# Altium PCB project_name.PcbDoc
Units mm, origin at the board's own origin, x right, y up, seen from the top; angles counter-clockwise.
Board outline 82.66 x 56.61 mm, 2 copper layers (Top Layer, Bottom Layer); 12 components, 74 nets, 40 pads, 0 vias.
Unrouted connection lines stored in the file: 11.
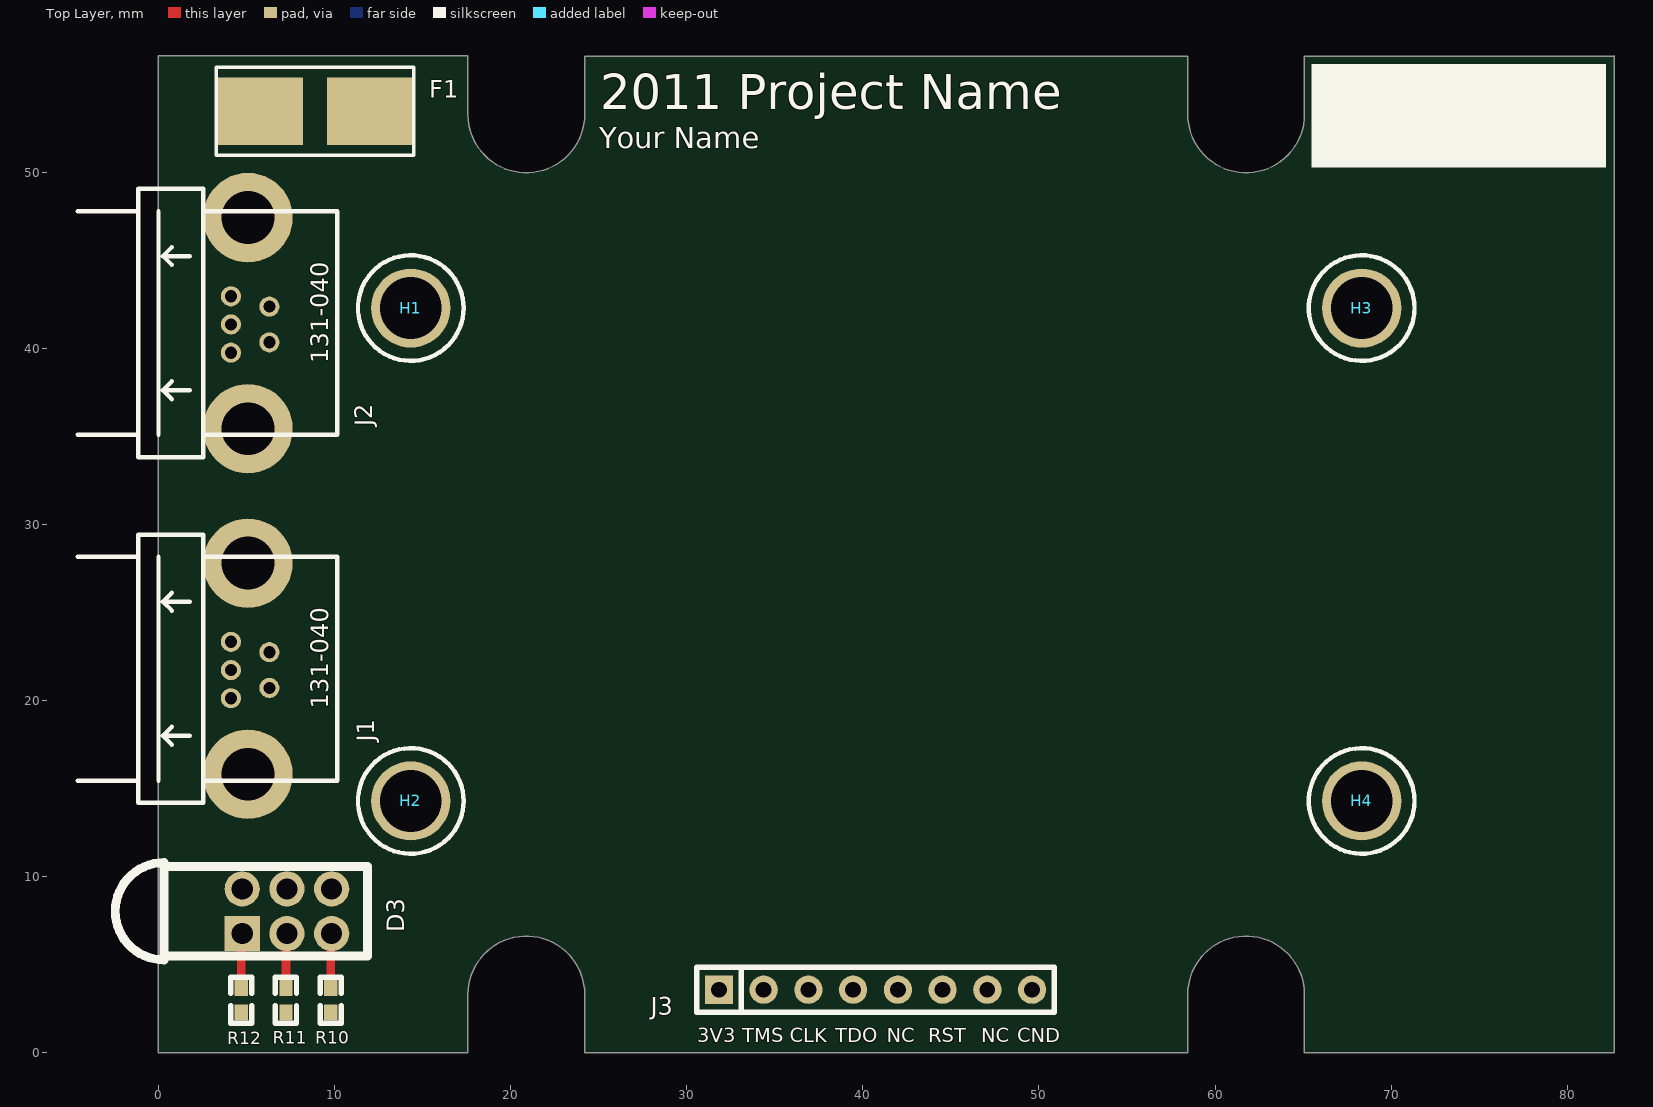
[diagram p0: Top Layer view]
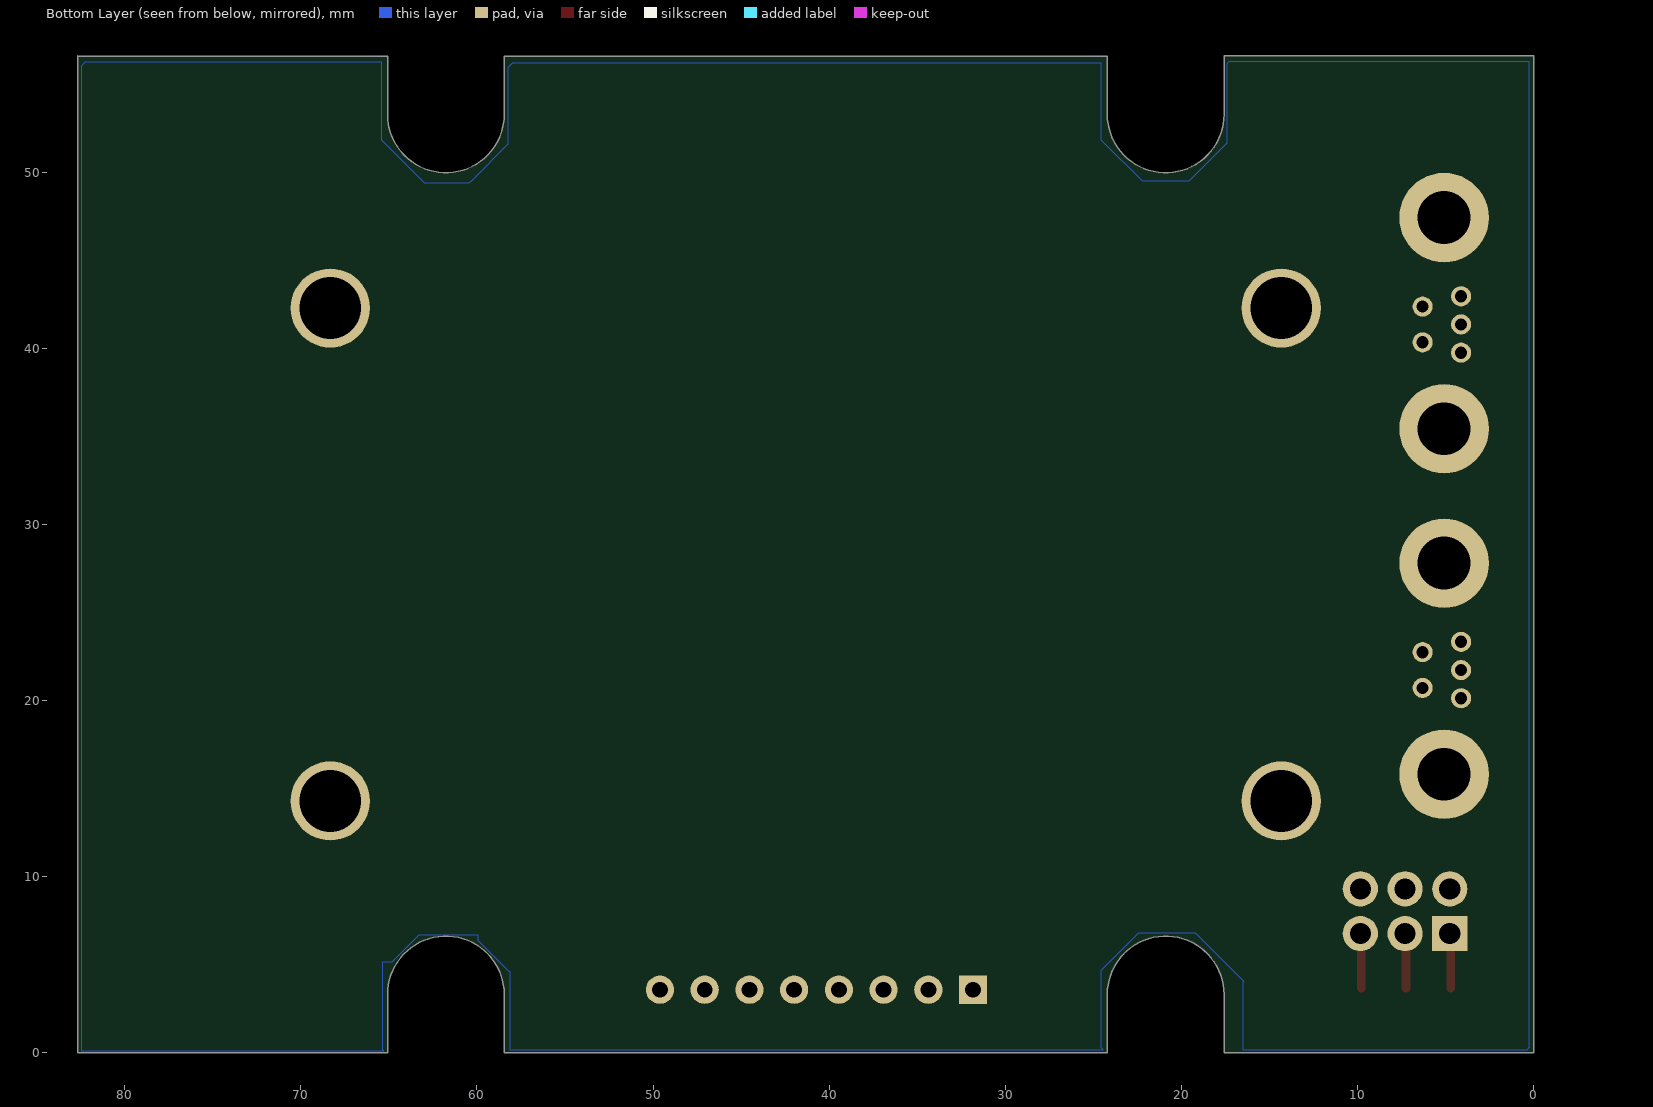
[diagram p1: Bottom Layer view, seen from below]

## Layer stack, top to bottom
Top Layer: signal copper 0.0356
Dielectric: dielectric 0.32, FR-4, Dk 4.8
Bottom Layer: signal copper 0.0356

## Board outline
17.575,0 17.575,3.31 cw(c20.89,3.31) 24.205,3.31 24.205,0 58.445,0 58.445,3.31 cw(c61.76,3.31) 65.075,3.31 65.075,0 65.08,-0.005 82.655,-0.005 82.655,56.605 82.65,56.6 65.075,56.6 65.075,53.29 cw(c61.76,53.29) 58.445,53.29 58.445,56.6 24.205,56.6 24.205,53.29 cw(c20.89,53.29) 17.575,53.29 17.575,56.605 -0.005,56.605 -0.005,-0.005 0,0

## Design rules (kind name [scope] priority, off if disabled: settings)
Clearance Clearance_1 [(HasFootprint('HMC5843 - LPCC 20 Pin') OR HasFootprint('ITG-3200 - QFN 24 Pin') OR HasFootprint('LGA - BMA180'))] p1: gap=0
Clearance [All] p2: gap=0.2
FabricationTestPointUsage TestPointUsage [All] p1: valid=0 allowmultiple=FALSE
FabricationTestpoint Testpoint [All] p1: side=3 testpointundercomponent=TRUE minsize=1.016 maxsize=2.54 preferedsize=1.524 minholesize=0 maxholesize=1.016 preferedholesize=0.813 testpointgrid=0.025 allowsidetop=TRUE allowsidebottom=TRUE usegrid=TRUE gridtolerance=0
HoleSize [All] p1 off: absolutevalues=TRUE maxlimit=5 minlimit=0.3 maxpercent=80.000 minpercent=20.000
MinimumSolderMaskSliver MinimumSolderMaskSliver_1 [(HasFootprint('ITG-3200 - QFN 24 Pin'))] p1: minsoldermaskwidth=0
MinimumSolderMaskSliver [All] p2: minsoldermaskwidth=0.254
PolygonConnect [All] p1: connectstyle=Relief reliefconductorwidth=0.254 reliefentries=4 polygonreliefangle="90 Angle"
RoutingVias [All] p1: holewidth=0.4 width=0.8 viastyle="Through Hole" minholewidth=0.4 minwidth=0.8 maxholewidth=0.4 maxwidth=0.8
SilkToSilkClearance [All] p1: silktosilkclearance=0.1
SilkscreenOverComponentPads [All] p1 off: minsilkscreentomaskgap=0.1
SolderMaskExpansion [All] p1: expansion=0.102
Width [All] p1: maxlimit=10 minlimit=0.2 preferedwidth=0.254 minimp=50.000000 maximp=50.000000 favimp=50.000000
22 further rules are at their usual default settings.

## Classes and differential pairs
component class LPC: J3
component class PWR: F1 J1 J2
component class TopLevel: D3 H1 H2 H3 H4 R10 R11 R12

## Components (designator, comment, footprint, x,y, rotation, side; value= is the part's Value field where it differs from the comment)
D3 "1882-2781" LED_TRILEVEL 4.755,6.77 r90 top
F1 "125mA/3A" LITTELFUSE-154 8.89,53.467 r0 top
H1 "HOLE" M2.5 14.326,42.291 r0 top
H2 "HOLE" M2.5 14.326,14.3 r0 top
H3 "HOLE" M2.5 68.326,42.291 r0 top
H4 "HOLE" M2.5 68.326,14.3 r0 top
J1 "CON5-S" TRIAD5F 6.3,22.75 r90 top
J2 "CON5-S" TRIAD5F 6.3,42.375 r90 top
J3 "LPC SWD Connector" IDC8 31.826,3.581 r0 top
R10 "1K" 0603 9.779,3.683 r270 top
R11 "1K" 0603 7.239,3.683 r270 top
R12 "1K" 0603 4.699,3.683 r270 top

## Footprints (in the part's own frame and the unit in brackets; to place one, negate y for a bottom-side part, rotate by r counter-clockwise, add the part's x,y. Pads: shape width x height; smd on the part's side, far side on the other; paste and mask are expansions set on the pad)
0603 [mil]
  rect 35.43x30 smd: 1(0,0) 2(55,0)
  silkscreen extent -24,-24 79,24
IDC8 [mm]
  rect 1.6x1.6 hole 0.9: 1(0,0)
  round 1.6 hole 0.9: 2(2.54,0) 3(5.08,0) 4(7.62,0) 5(10.16,0) 6(12.7,0) 7(15.24,0) 8(17.78,0)
  silkscreen extent -1.27,-1.27 19.05,1.27
LED_TRILEVEL [mm]
  rect 2x2 hole 1.2: 1(0,0)
  round 2 hole 1.2: 2(0,-2.54) 3(0,-5.08) 4(2.54,-5.08) 5(2.54,-2.54) 6(2.54,0)
  silkscreen extent -1.49,-7.11 4.03,7.21
LITTELFUSE-154 [mm]
  rect 5x3.81 smd: 1(-3.185,0) 2(3.185,0)
  silkscreen extent -5.6,-2.51 5.6,2.5
M2.5 [mm]
  round 4.5 hole 3.5: 1(0,0)
  silkscreen extent -3,-3 3,3
TRIAD5F [mil]
  round 200 hole 118.11: 0(-273,48) 0(199,48)
  round 45 hole 27.56: 1(0,0) 2(23,86) 3(-40,86) 4(-103,86) 5(-80,0)
  silkscreen extent -337,-152 263,428

## Part data
D3: library part LED-TRILEVEL, "Three level LED"
F1: library part FUSE2, "Fuse"
H1 H2 H3 H4: "Hole"
J1 J2: "Connector, 2 pin, with shield @ S"
J3: library part LPCLink_Connector
R10 R11 R12: library part RES1, "Resistor"

## Nets (pads, with @x,y where several pads share a name; then routed paths per layer and width w, separated by ;. In a path a pad name is that pad's centre, name@x,y a point inside that pad or via, vN(x,y) a via of type N, cw(c..) or ccw(c..) an arc to the next point about the centre after c; other vN are vias at no path point)
3V3: D3.4 D3.5 D3.6 J3.1
12V_MEASURE: 
/RESET: J3.6
ACC_P5: 
ACC_P7: 
ACC_P8: 
ACC_P9: 
ACCPWR: 
CAN+5V: J1.1 J2.1
CAN+12V: F1.2
CAN_H: J1.4 J2.4
CAN_L: J1.5 J2.5
CANGND: J1.3 J2.3 J3.8 R10.2
CHIPSEL: 
GYROPWR: 
I2C_SCL: 
I2C_SDA: 
MAGINT: 
MAGPWR: 
MISO1: 
MOSI1: 
NetC4_1: 
NetC7_2: 
NetC14_1: 
NetC18_1: 
NetC22_1: 
NetC23_1: 
NetC23_2: 
NetC26_2: 
NetC27_1: 
NetD2_K: 
NetD3_1: D3.1 R12.1 | length 3
  Top Layer w0.5: R12.1 D3.1@4.699,6.714
NetD3_2: D3.2 R11.1 | length 3.1
  Top Layer w0.5: R11.1 7.239,6.714 D3.2
NetD3_3: D3.3 R10.1 | length 3.1
  Top Layer w0.5: R10.1 9.779,6.714 D3.3
NetF1_1: F1.1 J1.2 J2.2
NetJ5_2: 
NetJ5_3: 
NetJ5_5: 
NetJ5_6: 
NetJ5_7: 
NetJ5_8: 
NetJ5_10: 
NetJ6_2: 
NetJ6_3: 
NetR1_1: 
NetR6_1: 
NetR7_1: 
NetR21_1: 
NetR22_1: 
NetU1_1: 
NetU1_4: 
NetU4_4: 
NetU5_12: 
NetU7_1: 
NetU7_2: 
NetU7_9: 
NetU7_10: 
NetU7_14: 
NetU7_17: 
NetU7_18: 
NetU7_21: 
NetU7_40: 
NetU7_42: 
NetU7_43: 
NetU7_45: 
NetU7_48: 
REDLED: R12.2
SCK1: 
TCLK: J3.3
TDO: J3.4
TMS: J3.2
XTALIN: 
XTALOUT: 
YELLED: R11.2
pads on no net: H1.1 H2.1 H3.1 H4.1 J1.0 J2.0 J3.5 J3.7

## Polygon pours and split planes (outlines as drawn)
CANGND on Bottom Layer "GNDPLANE" (solid, shelved, pour order 1001): 0.254,56.286 17.272,56.286 17.323,56.236 17.424,56.134 17.424,51.664 17.424,51.638 19.253,49.809 19.583,49.479 22.149,49.479 22.2,49.479 24.486,51.765 24.536,51.816 24.536,56.185 57.988,56.185 58.242,55.931 58.242,51.968 58.242,51.587 60.3,49.53 60.452,49.378 62.967,49.378 65.354,51.765 65.405,51.816 65.405,56.236 82.271,56.236 82.474,56.032 82.474,0.127 65.303,0.127 65.354,0.178 65.354,5.156 64.821,5.156 63.271,6.706 59.944,6.706 59.944,6.401 58.242,4.699 58.141,4.597 58.141,0.178 24.435,0.178 24.536,0.279 24.536,3.759 24.536,4.699 22.479,6.756 22.428,6.807 19.355,6.807 19.202,6.807 16.459,4.064 16.51,4.013 16.51,0.178 0.356,0.178 0.203,0.33 0.254,0.381 0.254,56.286
no net on Top Layer "TopShield" (solid, remove dead copper, shelved, pour order 1000): 25.552,151.562 42.723,151.562 42.774,151.511 42.774,147.98 42.774,146.964 44.806,144.932 44.831,144.907 46.761,144.907 47.65,144.907 49.428,146.685 49.759,147.015 49.759,151.536 83.591,151.536 83.617,151.511 83.668,151.46 83.668,147.98 83.668,146.939 85.268,145.339 85.725,144.882 88.24,144.882 88.544,144.882 90.145,146.482 90.653,146.99 90.653,151.536 107.823,151.536 107.874,151.486 107.874,95.301 90.653,95.301 90.627,95.326 90.627,98.831 90.627,99.797 88.697,101.727 88.519,101.905 85.573,101.905 85.573,101.829 83.668,99.924 83.668,95.301 49.708,95.301 49.784,95.377 49.784,99.009 49.784,99.797 47.854,101.727 47.676,101.905 45.187,101.905 44.856,101.905 42.774,99.822 42.799,99.797 42.799,95.301 25.527,95.301 25.552,95.326 25.552,151.562

## Silkscreen, mask and mechanical layers (free items; w line width, h text height)
Top Overlay:
  rectangle: 65.481,50.267 82.194,56.159
  text "2011 Project Name" at 25.095,53.594 h2
  text "Your Name" at 25.019,51.359 h1.2
  text "3V3" at 30.607,0.584 h0.8
  text "TMS" at 33.147,0.584 h0.8
  text "CLK" at 35.839,0.584 h0.8
  text "TDO" at 38.43,0.584 h0.8
  text "NC" at 41.351,0.584 h0.8
  text "RST" at 43.713,0.584 h0.8
  text "NC" at 46.711,0.584 h0.8
  text "CND" at 48.768,0.584 h0.8
Mechanical 1:
  circle w0.254: c14.325,14.3 r1.602
  circle w0.254: c68.325,14.3 r1.602
  circle w0.254: c14.325,42.3 r1.602
  lines w0.254: -0.005,-0.005 -0.005,56.605 17.575,56.605 17.575,53.295 ; 0,0 17.575,0 17.575,3.31 cw(c20.89,3.31) 24.205,3.31 24.205,0 58.445,0 ; 0.376,10.739 12.009,10.739 ; 0.554,5.329 11.933,5.329 ; 7.818,28.214 10.231,28.214 10.231,15.387 7.92,15.387 ; 7.818,47.849 10.231,47.849 10.231,35.022 7.92,35.022 ; 17.575,53.29 ccw(c20.89,53.29) 24.205,53.29 24.205,56.6 58.445,56.6 58.445,53.29 ccw(c61.76,53.29) 65.075,53.29 65.075,56.6 82.65,56.6 ; 58.445,3.31 cw(c61.76,3.31) 65.075,3.31 ; 65.08,-0.005 82.655,-0.005 82.655,56.605
  text "Hole = 3.5mm" at 12.167,63.754 h1
  text "Press q to toggle mil and mm" at -48.621,51.201 h1
  text "CAN_2 Placement" at -25.005,43.048 h1
  text "X 6.300mm" at -25.005,40.457 h1
  text "Y 42.375mm" at -25.005,37.79 h1
  text "CAN_1 Placement" at -25.005,23.338 h1
  text "X 6.300mm" at -25.005,20.747 h1
  text "Y 22.750mm" at -25.005,18.08 h1
  text "LED Placement" at -25.005,9.52 h1
  text "X 4.755mm" at -25.005,6.929 h1
  text "Y 6.770mm" at -25.005,4.262 h1

## Text inside footprints (layer, text, board x,y; h text height)
J1: Top Overlay "131-040" at 9.653,19.524 h1 r90
J2: Top Overlay "131-040" at 9.653,39.149 h1 r90